# Altium PCB AC Carrier.PcbDoc
Units mm, origin at the board's own origin, x right, y up, seen from the top; angles counter-clockwise.
Board outline 102 x 123 mm, 2 copper layers (Top Layer, Bottom Layer), stack 1.062 mm thick; 15 components, 7 nets, 26 pads, 2 vias.
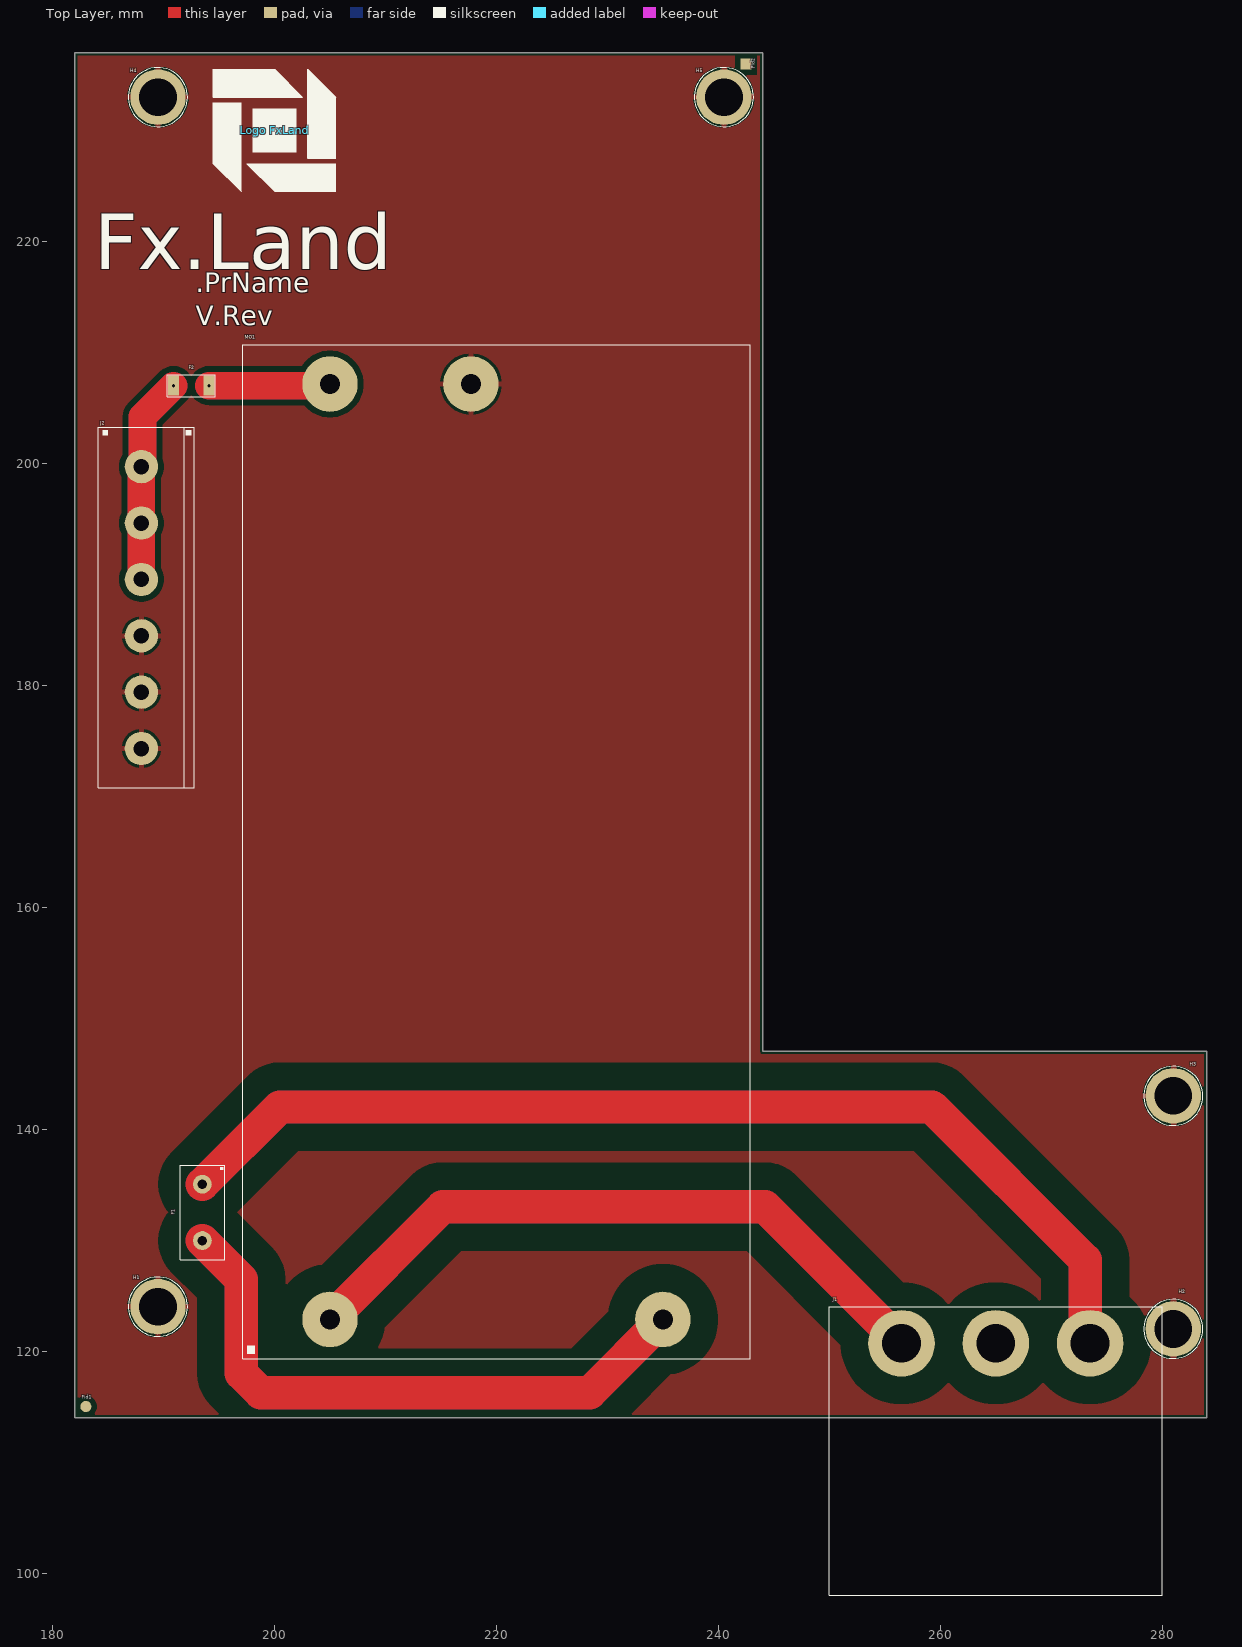
[diagram p0: Top Layer view]
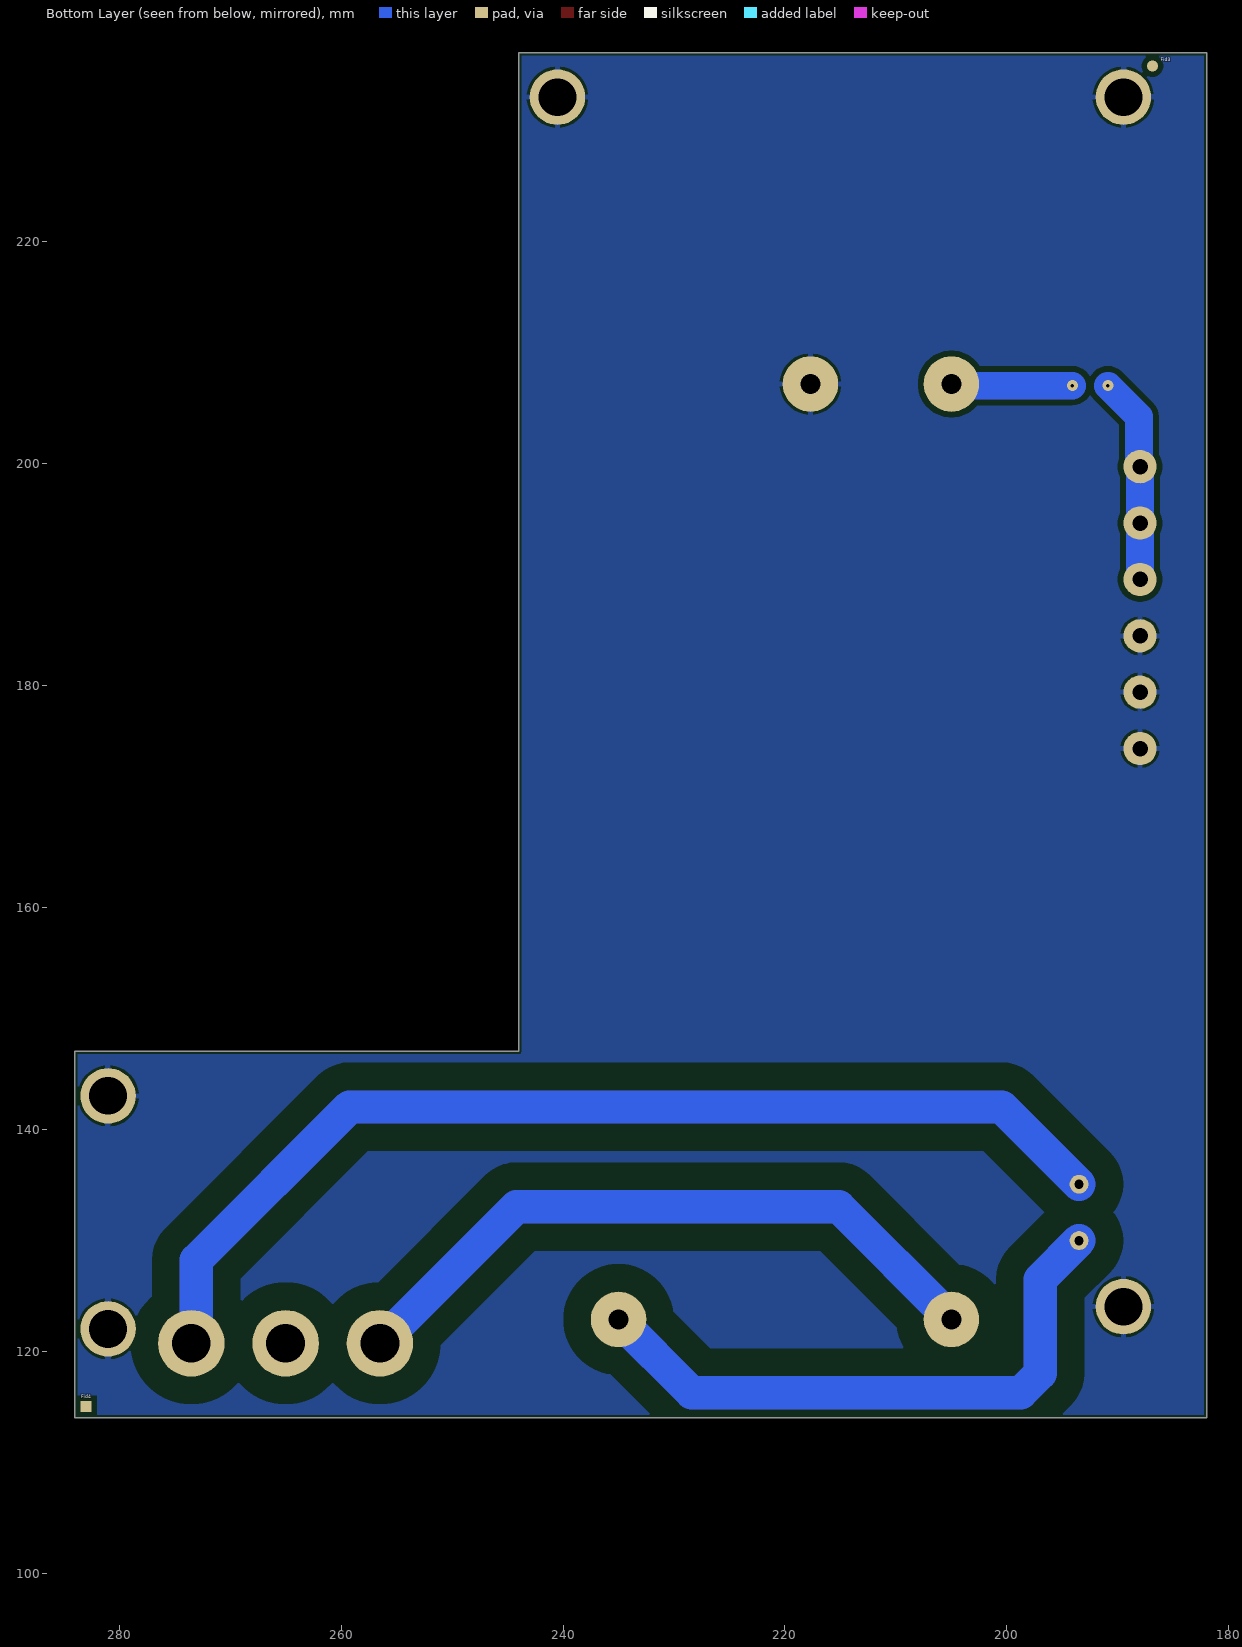
[diagram p1: Bottom Layer view, seen from below]
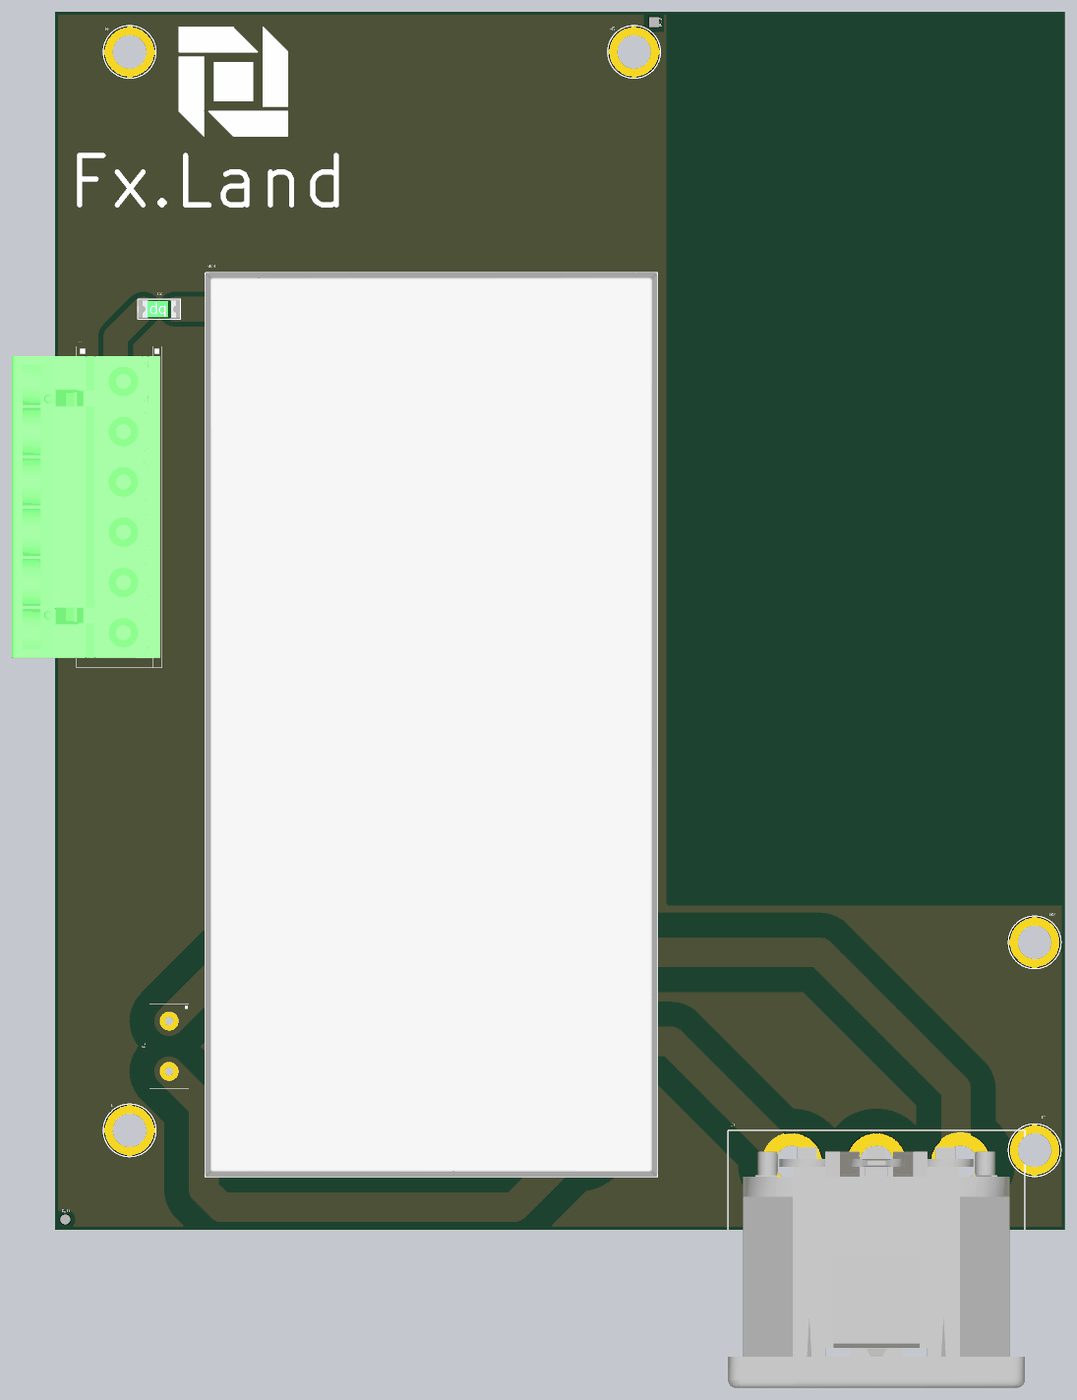
[diagram p2: 3D render of the assembled board from above, using the file's embedded part models]

## Layer stack, top to bottom
Top Solder: solder mask 0.0102, Solder Resist, Dk 3.5
Top Layer: signal copper 0.0356
Dielectric 1.2: core 0.9906, Core-042, Dk 4.6
Bottom Layer: signal copper 0.0356
Bottom Solder: solder mask 0.0102, Solder Resist, Dk 3.5

## Board outline
182,114 284,114 284,147 244,147 244,237 182,237

## Design rules (kind name [scope] priority, off if disabled: settings)
BoardOutlineClearance [All] p1: gap=0.254 ignorepadtopadclearanceinfootprint=FALSE except(0: Arc-SplitContinuation Track-SplitContinuation SMDPad-SplitContinuation THPad-SplitContinuation Via-SplitContinuation Fill-SplitContinuation Poly-SplitContinuation Region-SplitContinuation Text-SplitContinuation)
Clearance Clearance_1 [InNet('L') or InNet('NetF1_2') or InNet('N') or InNet('PE')] p1: gap=2.5 ignorepadtopadclearanceinfootprint=FALSE except(0: Arc-Text Arc-Hole Track-Text Track-Hole SMDPad-Text SMDPad-Hole THPad-Text THPad-Hole Via-Text Via-Hole Fill-Text Fill-Hole Poly-Text Poly-Hole Region-Text Region-Hole Text-Text Text-Hole)
Clearance [All] p2: gap=0.508 ignorepadtopadclearanceinfootprint=FALSE except(0: Arc-Text Arc-Hole Track-Text Track-Hole SMDPad-Text SMDPad-Hole THPad-Text THPad-Hole Via-Text Via-Hole Fill-Text Fill-Hole Poly-Text Poly-Hole Region-Text Region-Hole Text-Text Text-Hole)
ComponentClearance [All] p1: gap=0 collisioncheckmode=3 verticalgap=0 showdistances=FALSE
PolygonConnect [All] p1: thpad.connectstyle=Relief thpad.reliefconductorwidth=0.5 thpad.reliefentries=4 thpad.polygonreliefangle="90 Angle" thpad.airgapwidth=0.254 smdpad.connectstyle=Relief smdpad.reliefconductorwidth=0.254 smdpad.reliefentries=4 smdpad.polygonreliefangle="90 Angle" smdpad.airgapwidth=0.254 via.connectstyle=Relief via.reliefconductorwidth=0.254 via.reliefentries=4 via.polygonreliefangle="90 Angle" via.airgapwidth=0.254
RoutingVias [All] p1: holewidth=0.3 width=0.5 viastyle="Through Hole" minholewidth=0.1 minwidth=0.3 maxholewidth=5 maxwidth=10
SolderMaskExpansion [All] p1: expansion=0.102 istentingtop=FALSE
Width [All] p1: maxlimit=20 minlimit=0.127 preferedwidth=0.254
29 further rules are at their usual default settings.

## Components (designator, comment, footprint, x,y, rotation, side; value= is the part's Value field where it differs from the comment)
F1 "3.15A" Lead2INCHSqaure 193.5,132.5 r270 top
F2 "4A" F1206 192.5,207 r180 top
Fid1 "Fiducial" FidR_1.0mm 183,115 r0 top locked
Fid2 "Fiducial" FidS_1.0mm 242.5,236 r0 top
Fid3 "Fiducial" FidR_1.0mm 186.881,235.807 r180 bottom
Fid4 "Fiducial" FidS_1.0mm 283,115 r180 bottom
H1 "Hole M3" HOLE_M3 189.5,124 r0 top locked
H2 "Hole M3" HOLE_M3 281,122 r0 top locked
H3 "Hole M3" HOLE_M3 281,143 r0 top locked
H4 "Hole M3" HOLE_M3 189.5,233 r0 top locked
H5 "Hole M3" HOLE_M3 240.5,233 r0 top locked
J1 "C14 Connector" IEC_INLET_PX0575SERIES 265,113 r180 top
J2 "1757051" 1757051 188,187 r270 top
"Logo FxLand" "FxLand" Logo_FxLand_3 200,230 r0 top
MO1 "AC/DC" ECE80 220,165 r90 top

## Footprints (in the part's own frame and the unit in brackets; to place one, negate y for a bottom-side part, rotate by r counter-clockwise, add the part's x,y. Pads: shape width x height; smd on the part's side, far side on the other; paste and mask are expansions set on the pad)
1757051 [mm]
  round 3 hole 1.4: 1(-12.7,0) 2(-7.62,0) 3(-2.54,0) 4(2.54,0) 5(7.62,0) 6(12.7,0)
  silkscreen extent -16.25,-3.88 16.25,4.78, body extent -15.27,-10.4 15.27,4.6, height 38.07
ECE80 [mm]
  round 5 hole 1.8: +V(42.15,15) -V(42.15,2.3) ACL(-42.15,-15) ACN(-42.15,15)
  silkscreen extent -45.7,-22.85 45.7,22.85, body extent -45.7,-22.86 45.7,22.86, height 27.95
F1206 [mm]
  rect 1x1.8 smd paste+0 mask+0: 1(-1.6,0) 2(1.6,0)
  silkscreen extent -2.16,-1 2.16,1, body extent -1.7,-0.85 1.7,0.85, height 0.8
FidR_1.0mm [mm]
  round 1 smd: 1(0,0)
FidS_1.0mm [mm]
  rect 1x1 smd: 1(0,0)
HOLE_M3 [mm]
  round 5 hole 3.4: 1(0,0)
  silkscreen extent -2.66,-2.66 2.67,2.66
IEC_INLET_PX0575SERIES [mm]
  round 6 hole 3.5: 1(-8.5,-7.7) 2(0,-7.7) 3(8.5,-7.7)
  silkscreen extent -15,-11 15,15, body extent -15,-9.3 15,15, height 21.25
Lead2INCHSqaure [mm]
  round 1.7 hole 0.85: 1(-2.54,0) 2(2.54,0)
  silkscreen extent -4.25,-2 4.25,2, body extent -4.25,-2 4.25,2, height 8.1
Logo_FxLand_3 [mm]
  silkscreen extent -5.5,-5.5 5.5,5.5

## Part data
F1: library part F0003, "AC 3.15A", ID=3, ManfactPart=0697A3150-01, Part Number=F0003, RefVal=3.15A
F2: library part F0013, "65V/4A", ID=13, ManfactPart=SF-1206SA400M-2, Part Number=F0013, RefVal=4A
Fid1 Fid3: library part ME0011, "Fiducial Round 1mm", ID=11, Part Number=ME0011, RefVal=Fiducial
Fid2 Fid4: library part ME0012, "Fiducial Sqaure 1mm", ID=12, Part Number=ME0012, RefVal=Fiducial
H1 H2 H3 H4 H5: library part ME0001, "Mounting Hole M3", ID=1, Part Number=ME0001, RefVal="Hole M3"
J1: library part CO0038, ID=38, ManfactPart=PX0575/10/PC, Part Number=CO0038, RefVal="C14 Connector"
J2: library part CO0034, "Pluggable Terminal Blocks 6 Pos 5.08mm pitch Plug 24-12 AWG Screw", ID=34, ManfactPart=1757051, Part Number=CO0034, RefVal=1757051
"Logo FxLand": library part ME0008, "Logo FxLand 3", ID=8, Part Number=ME0008, RefVal=FxLand
MO1: library part MO0021, "AC-DC Power Supplies", ID=21, ManfactPart=ECE80US24, Part Number=MO0021, RefVal=AC/DC

## Via types
v1: diameter 1, hole 0.3, Top Layer to Bottom Layer, 2 vias

## Nets (pads, with @x,y where several pads share a name; then routed paths per layer and width w, separated by ;. In a path a pad name is that pad's centre, name@x,y a point inside that pad or via, vN(x,y) a via of type N, cw(c..) or ccw(c..) an arc to the next point about the centre after c; other vN are vias at no path point)
+24V: F2.2 J2.1 J2.2 J2.3 | length 37.3
  Top Layer w2.5: J2.3 J2.2 J2.1 188.096,199.796 188.096,204.196 v1(190.9,207)
  Bottom Layer w2.5: J2.3 J2.2 J2.1 188.096,199.796 188.096,204.196 v1(190.9,207)
GND: H1.1 H2.1 H3.1 H4.1 H5.1 J2.4 J2.5 J2.6 MO1.-V
L: F1.1 J1.1 | length 191.7
  Top Layer w3: F1.1 200.46,142 259.25,142 273.05,128.2 273.05,121.15 J1.1
  Bottom Layer w3: F1.1 200.46,142 259.25,142 273.05,128.2 273.05,121.15 J1.1
N: J1.3 MO1.ACN | length 121.6
  Top Layer w3: MO1.ACN 215.15,133 244.2,133 J1.3
  Bottom Layer w3: MO1.ACN 215.15,133 244.2,133 J1.3
NetF1_2: F1.2 MO1.ACL | length 109.7
  Top Layer w3: F1.2 197,126.46 197,118.007 198.757,116.25 228.4,116.25 MO1.ACL
  Bottom Layer w3: F1.2 197,126.46 197,118.007 198.757,116.25 228.4,116.25 MO1.ACL
NetF2_1: F2.1 MO1.+V | length 21.9
  Top Layer w2.5: v1(194.1,207) 204.85,207 MO1.+V
  Bottom Layer w2.5: v1(194.1,207) 204.85,207 MO1.+V
PE: J1.2
pads on no net: Fid1.1 Fid2.1 Fid3.1 Fid4.1

## Polygon pours and split planes (outlines as drawn)
GND on Top Layer "GND_L01_P001" (solid, pour order 1): 182,114 284,114 284,147 244,147 244,237 182,237
GND on Bottom Layer "GND_L02_P002" (solid, pour order 2): 182,114 284,114 284,147 244,147 244,237 182,237

## Silkscreen, mask and mechanical layers (free items; w line width, h text height)
Top Overlay:
  text ".PrName / V.Rev" at 192.901,211.85 h3
Board Shape:
  the board outline again, w0.1

## Text inside footprints (layer, text, board x,y; h text height)
"Logo FxLand": Top Overlay "Fx.Land" at 183.755,217.501 h5